# EAGLE board Qwiic_GPIO-Panel (EAGLE 9.6.0), part 1 of 2
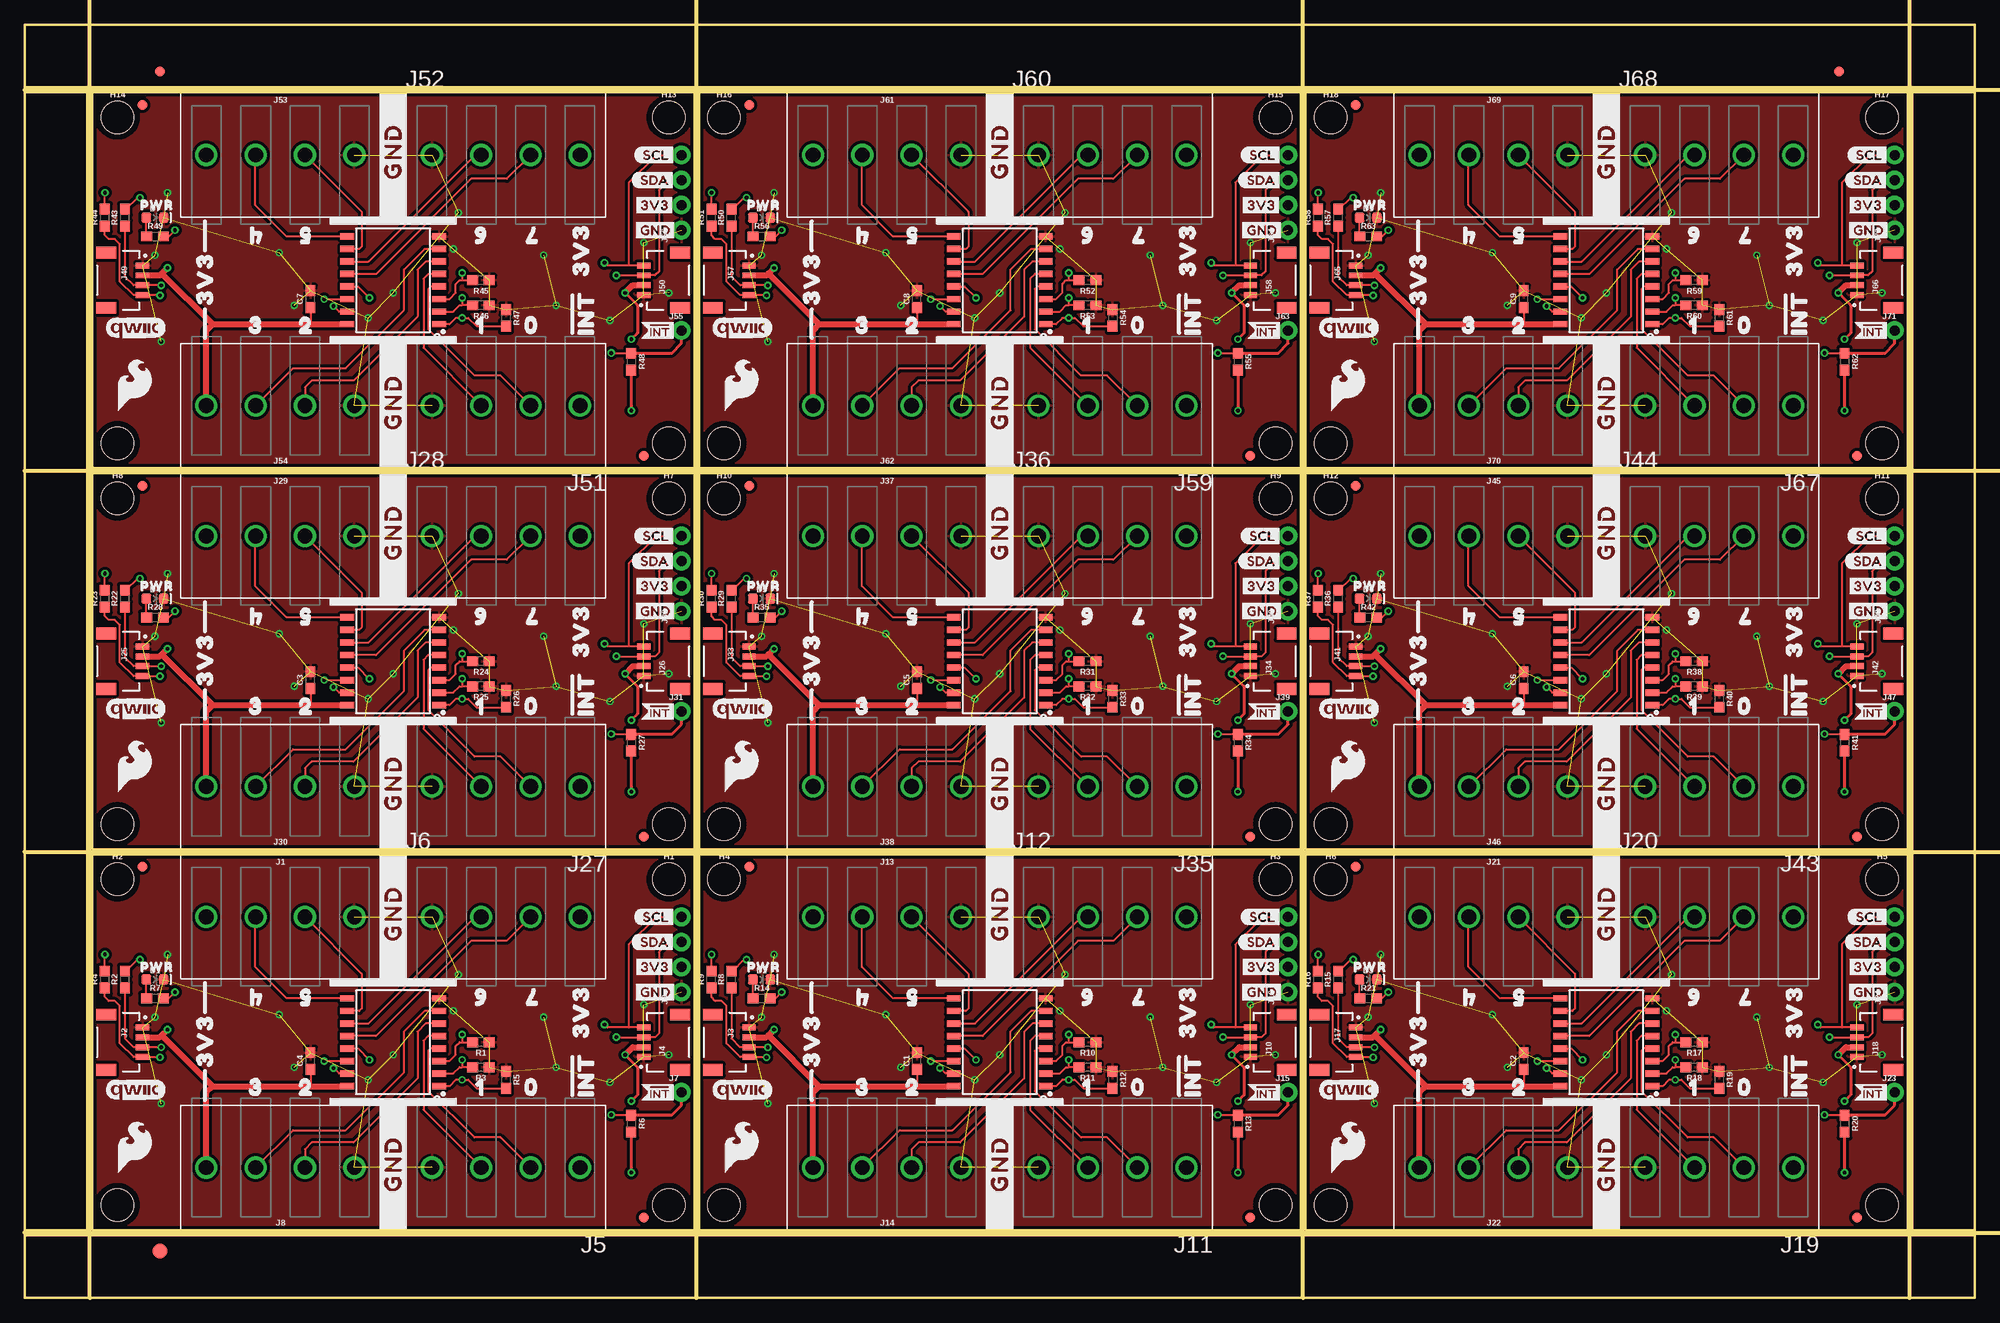
[diagram p0: board, top side]
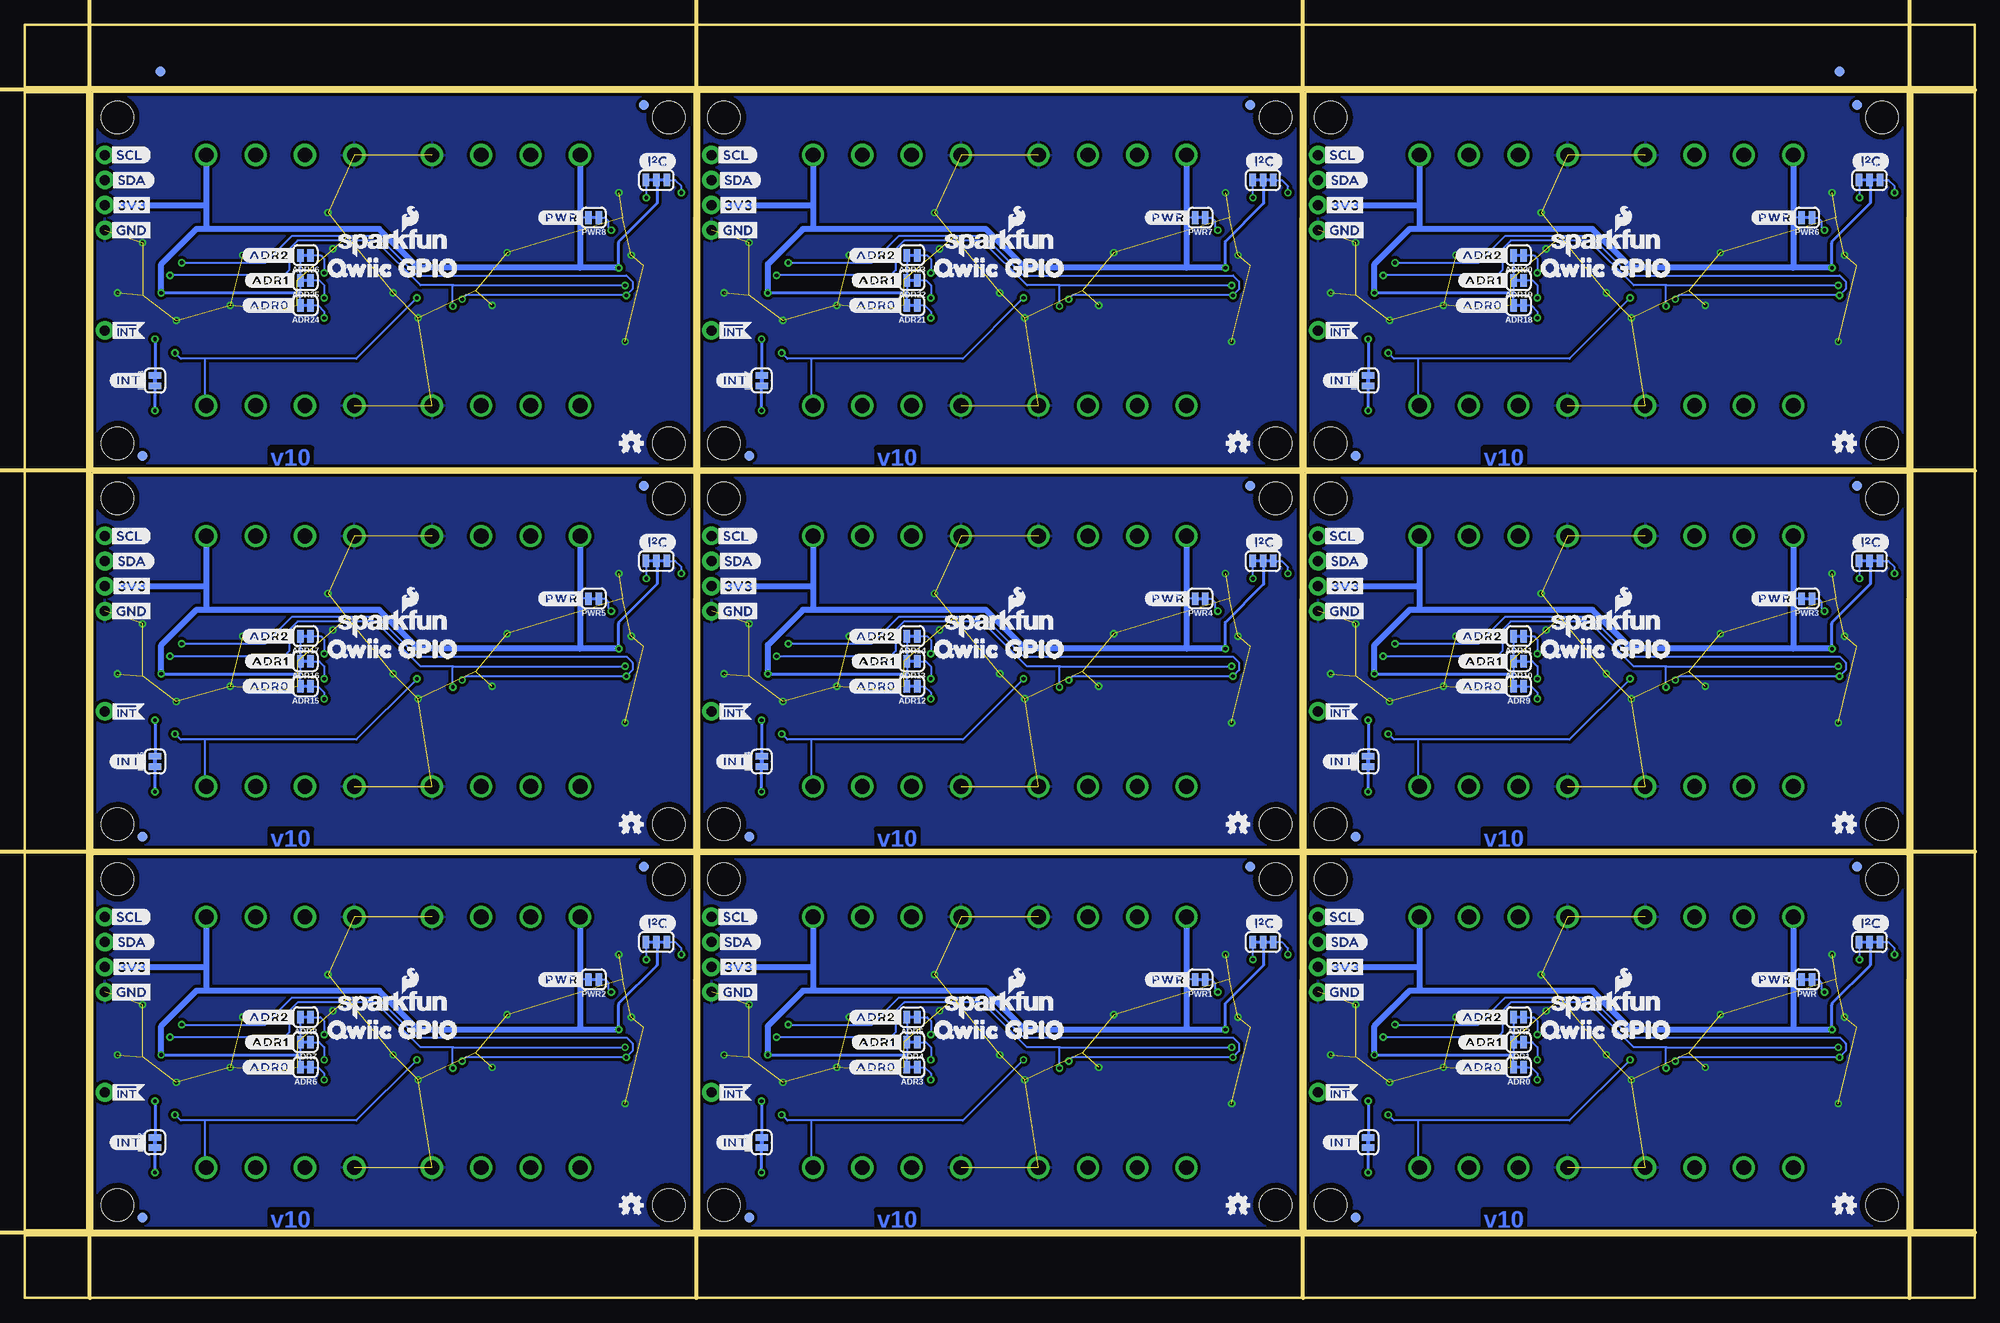
[diagram p1: board, bottom side, seen from below]

Size 197.61 x 129.03 mm. Coordinates in mm from the lower left corner, seen from the top.
Outline: 6.86,44.96 67.82,44.96 67.82,6.86 6.86,6.86 6.86,44.96
Outline: 68.33,44.96 129.29,44.96 129.29,6.86 68.33,6.86 68.33,44.96
Outline: 129.79,44.96 190.75,44.96 190.75,6.86 129.79,6.86 129.79,44.96
Outline: 6.86,83.57 67.82,83.57 67.82,45.47 6.86,45.47 6.86,83.57
Outline: 68.33,83.57 129.29,83.57 129.29,45.47 68.33,45.47 68.33,83.57
Outline: 129.79,83.57 190.75,83.57 190.75,45.47 129.79,45.47 129.79,83.57
Outline: 6.86,122.17 67.82,122.17 67.82,84.07 6.86,84.07 6.86,122.17
Outline: 68.33,122.17 129.29,122.17 129.29,84.07 68.33,84.07 68.33,122.17
Outline: 129.79,122.17 190.75,122.17 190.75,84.07 129.79,84.07 129.79,122.17
Outline: 0,6.35 197.61,6.35 197.61,0 0,0 0,6.35
Outline: 191.26,122.17 197.61,122.17 197.61,6.86 191.26,6.86 191.26,122.17
Outline: 0,129.03 197.61,129.03 197.61,122.68 0,122.68 0,129.03
Outline: 0,122.17 6.35,122.17 6.35,6.86 0,6.86 0,122.17
Copper layers (1*16): Top 0.035mm / dielectric 1.5mm / Bottom 0.035mm
Design rules "Qwiic_GPIO": minimum track width 7mil, minimum drill 15mil, track to track 7mil, track to pad 7mil, pad to pad 7mil, via to via 7mil, smd to smd 7mil, copper to edge 7mil, drill to drill 7mil, minimum pad ring 7mil, minimum via ring 7mil, stop-mask expansion 4mil, vias tented up to drill 25mil, thermal gap 10mil
Milling: 8 lines

## Footprints (pad centres in the part's own frame; a part is rotated, then mirrored left to right if it is on the bottom)
SMT-JUMPER_2_NC_TRACE_SILK = smd 0.66 x 1.27: 1 -0.521,0; 2 0.521,0
0603 = smd 1.1 x 1: 1 -0.85,0; 2 0.85,0
LED-0603 = smd 1 x 1: A -0.877,0; C 0.877,0
FIDUCIAL-1X2 = smd 1 x 1: 1 0,0
FIDUCIAL-1.5X3 = smd 1.5 x 1.5: 1 0,0
STAND-OFF = hole 3.302: 0,0
SMT-JUMPER_3_2-NC_TRACE_SILK = smd 0.66 x 1.27: 1 -1.041,0; 2 0,0; 3 1.041,0
LATCHTERMINAL-5MM-4 = drill 1.5: 1 -7.5,0; 2 -2.5,0; 3 2.5,0; 4 7.5,0
JST04_1MM_RA = smd 0.6 x 1.35: 1 -1.5,0; 2 -0.5,0; 3 0.5,0; 4 1.5,0 | smd 1.2 x 2: NC1 2.8,-3.675; NC2 -2.8,-3.675
1X01_NO_SILK = drill 1.016 pad 1.88: 1 0,0
1X04_NO_SILK = drill 1.016 pad 1.88: 1 0,0; 2 2.54,0; 3 5.08,0; 4 7.62,0
16SOIC = smd 1.397 x 0.648: 1 -4.65,4.445; 2 -4.65,3.175; 3 -4.65,1.905; 4 -4.65,0.635; 5 -4.65,-0.635; 6 -4.65,-1.905; 7 -4.65,-3.175; 8 -4.65,-4.445; 9 4.65,-4.445; 10 4.65,-3.175; 11 4.65,-1.905; 12 4.65,-0.635; 13 4.65,0.635; 14 4.65,1.905; 15 4.65,3.175; 16 4.65,4.445

## Placement (x,y rotation side)
ADR0  JUMPER-SMT_2_NC_TRACE_SILK  [SMT-JUMPER_2_NC_TRACE_SILK]  46.23,23.37 180 bottom
ADR1  JUMPER-SMT_2_NC_TRACE_SILK  [SMT-JUMPER_2_NC_TRACE_SILK]  46.23,25.91 180 bottom
ADR2  JUMPER-SMT_2_NC_TRACE_SILK  [SMT-JUMPER_2_NC_TRACE_SILK]  46.23,28.45 180 bottom
ADR3  JUMPER-SMT_2_NC_TRACE_SILK  [SMT-JUMPER_2_NC_TRACE_SILK]  107.7,23.37 180 bottom
ADR4  JUMPER-SMT_2_NC_TRACE_SILK  [SMT-JUMPER_2_NC_TRACE_SILK]  107.7,25.91 180 bottom
ADR5  JUMPER-SMT_2_NC_TRACE_SILK  [SMT-JUMPER_2_NC_TRACE_SILK]  107.7,28.45 180 bottom
ADR6  JUMPER-SMT_2_NC_TRACE_SILK  [SMT-JUMPER_2_NC_TRACE_SILK]  169.16,23.37 180 bottom
ADR7  JUMPER-SMT_2_NC_TRACE_SILK  [SMT-JUMPER_2_NC_TRACE_SILK]  169.16,25.91 180 bottom
ADR8  JUMPER-SMT_2_NC_TRACE_SILK  [SMT-JUMPER_2_NC_TRACE_SILK]  169.16,28.45 180 bottom
ADR9  JUMPER-SMT_2_NC_TRACE_SILK  [SMT-JUMPER_2_NC_TRACE_SILK]  46.23,61.98 180 bottom
ADR10  JUMPER-SMT_2_NC_TRACE_SILK  [SMT-JUMPER_2_NC_TRACE_SILK]  46.23,64.52 180 bottom
ADR11  JUMPER-SMT_2_NC_TRACE_SILK  [SMT-JUMPER_2_NC_TRACE_SILK]  46.23,67.06 180 bottom
ADR12  JUMPER-SMT_2_NC_TRACE_SILK  [SMT-JUMPER_2_NC_TRACE_SILK]  107.7,61.98 180 bottom
ADR13  JUMPER-SMT_2_NC_TRACE_SILK  [SMT-JUMPER_2_NC_TRACE_SILK]  107.7,64.52 180 bottom
ADR14  JUMPER-SMT_2_NC_TRACE_SILK  [SMT-JUMPER_2_NC_TRACE_SILK]  107.7,67.06 180 bottom
ADR15  JUMPER-SMT_2_NC_TRACE_SILK  [SMT-JUMPER_2_NC_TRACE_SILK]  169.16,61.98 180 bottom
ADR16  JUMPER-SMT_2_NC_TRACE_SILK  [SMT-JUMPER_2_NC_TRACE_SILK]  169.16,64.52 180 bottom
ADR17  JUMPER-SMT_2_NC_TRACE_SILK  [SMT-JUMPER_2_NC_TRACE_SILK]  169.16,67.06 180 bottom
ADR18  JUMPER-SMT_2_NC_TRACE_SILK  [SMT-JUMPER_2_NC_TRACE_SILK]  46.23,100.58 180 bottom
ADR19  JUMPER-SMT_2_NC_TRACE_SILK  [SMT-JUMPER_2_NC_TRACE_SILK]  46.23,103.12 180 bottom
ADR20  JUMPER-SMT_2_NC_TRACE_SILK  [SMT-JUMPER_2_NC_TRACE_SILK]  46.23,105.66 180 bottom
ADR21  JUMPER-SMT_2_NC_TRACE_SILK  [SMT-JUMPER_2_NC_TRACE_SILK]  107.7,100.58 180 bottom
ADR22  JUMPER-SMT_2_NC_TRACE_SILK  [SMT-JUMPER_2_NC_TRACE_SILK]  107.7,103.12 180 bottom
ADR23  JUMPER-SMT_2_NC_TRACE_SILK  [SMT-JUMPER_2_NC_TRACE_SILK]  107.7,105.66 180 bottom
ADR24  JUMPER-SMT_2_NC_TRACE_SILK  [SMT-JUMPER_2_NC_TRACE_SILK]  169.16,100.58 180 bottom
ADR25  JUMPER-SMT_2_NC_TRACE_SILK  [SMT-JUMPER_2_NC_TRACE_SILK]  169.16,103.12 180 bottom
ADR26  JUMPER-SMT_2_NC_TRACE_SILK  [SMT-JUMPER_2_NC_TRACE_SILK]  169.16,105.66 180 bottom
C1  0.1uF  [0603]  90.42,24 90 top
C2  0.1uF  [0603]  151.89,24 90 top
C3  0.1uF  [0603]  28.96,62.61 90 top
C4  0.1uF  [0603]  28.96,24 90 top
C5  0.1uF  [0603]  90.42,62.61 90 top
C6  0.1uF  [0603]  151.89,62.61 90 top
C7  0.1uF  [0603]  28.96,101.22 90 top
C8  0.1uF  [0603]  90.42,101.22 90 top
C9  0.1uF  [0603]  151.89,101.22 90 top
D1  RED  [LED-0603]  13.21,32.26 0 top
D2  RED  [LED-0603]  74.68,32.26 0 top
D3  RED  [LED-0603]  136.14,32.26 0 top
D4  RED  [LED-0603]  13.21,70.87 0 top
D5  RED  [LED-0603]  74.68,70.87 0 top
D6  RED  [LED-0603]  136.14,70.87 0 top
D7  RED  [LED-0603]  13.21,109.47 0 top
D8  RED  [LED-0603]  74.68,109.47 0 top
D9  RED  [LED-0603]  136.14,109.47 0 top
E$1  [FIDUCIAL-1X2]  13.72,124.27 0 top
E$2  [FIDUCIAL-1X2]  13.72,124.27 0 bottom
E$3  [FIDUCIAL-1X2]  183.83,124.27 0 top
E$4  [FIDUCIAL-1X2]  183.83,124.27 0 bottom
E$5  [FIDUCIAL-1.5X3]  13.72,4.76 0 top
FD1  FIDUCIAL1X2  [FIDUCIAL-1X2]  11.94,43.69 0 bottom
FD2  FIDUCIAL1X2  [FIDUCIAL-1X2]  62.74,8.13 270 bottom
FD3  FIDUCIAL1X2  [FIDUCIAL-1X2]  73.41,43.69 0 bottom
FD4  FIDUCIAL1X2  [FIDUCIAL-1X2]  124.21,8.13 270 bottom
FD5  FIDUCIAL1X2  [FIDUCIAL-1X2]  134.87,43.69 0 bottom
FD6  FIDUCIAL1X2  [FIDUCIAL-1X2]  185.67,8.13 270 bottom
FD7  FIDUCIAL1X2  [FIDUCIAL-1X2]  11.94,82.3 0 bottom
FD8  FIDUCIAL1X2  [FIDUCIAL-1X2]  62.74,46.74 270 bottom
FD9  FIDUCIAL1X2  [FIDUCIAL-1X2]  73.41,82.3 0 bottom
FD10  FIDUCIAL1X2  [FIDUCIAL-1X2]  124.21,46.74 270 bottom
FD11  FIDUCIAL1X2  [FIDUCIAL-1X2]  134.87,82.3 0 bottom
FD12  FIDUCIAL1X2  [FIDUCIAL-1X2]  185.67,46.74 270 bottom
FD13  FIDUCIAL1X2  [FIDUCIAL-1X2]  11.94,120.9 0 bottom
FD14  FIDUCIAL1X2  [FIDUCIAL-1X2]  62.74,85.34 270 bottom
FD15  FIDUCIAL1X2  [FIDUCIAL-1X2]  73.41,120.9 0 bottom
FD16  FIDUCIAL1X2  [FIDUCIAL-1X2]  124.21,85.34 270 bottom
FD17  FIDUCIAL1X2  [FIDUCIAL-1X2]  134.87,120.9 0 bottom
FD18  FIDUCIAL1X2  [FIDUCIAL-1X2]  185.67,85.34 270 bottom
FRAME1  FRAME-LETTER  [CREATIVE_COMMONS]  5.59,-3.3 0 top  (outside the outline)
FRAME2  FRAME-LETTER  [CREATIVE_COMMONS]  67.06,-3.3 0 top  (outside the outline)
FRAME3  FRAME-LETTER  [CREATIVE_COMMONS]  128.52,-3.3 0 top  (outside the outline)
FRAME4  FRAME-LETTER  [CREATIVE_COMMONS]  5.59,35.31 0 top
FRAME5  FRAME-LETTER  [CREATIVE_COMMONS]  67.06,35.31 0 top
FRAME6  FRAME-LETTER  [CREATIVE_COMMONS]  128.52,35.31 0 top
FRAME7  FRAME-LETTER  [CREATIVE_COMMONS]  5.59,73.91 0 top
FRAME8  FRAME-LETTER  [CREATIVE_COMMONS]  67.06,73.91 0 top
FRAME9  FRAME-LETTER  [CREATIVE_COMMONS]  128.52,73.91 0 top
H1  STAND-OFF  [STAND-OFF]  65.28,42.42 0 top
H2  STAND-OFF  [STAND-OFF]  9.4,42.42 0 top
H3  STAND-OFF  [STAND-OFF]  126.75,42.42 0 top
H4  STAND-OFF  [STAND-OFF]  70.87,42.42 0 top
H5  STAND-OFF  [STAND-OFF]  188.21,42.42 0 top
H6  STAND-OFF  [STAND-OFF]  132.33,42.42 0 top
H7  STAND-OFF  [STAND-OFF]  65.28,81.03 0 top
H8  STAND-OFF  [STAND-OFF]  9.4,81.03 0 top
H9  STAND-OFF  [STAND-OFF]  126.75,81.03 0 top
H10  STAND-OFF  [STAND-OFF]  70.87,81.03 0 top
H11  STAND-OFF  [STAND-OFF]  188.21,81.03 0 top
H12  STAND-OFF  [STAND-OFF]  132.33,81.03 0 top
H13  STAND-OFF  [STAND-OFF]  65.28,119.63 0 top
H14  STAND-OFF  [STAND-OFF]  9.4,119.63 0 top
H15  STAND-OFF  [STAND-OFF]  126.75,119.63 0 top
H16  STAND-OFF  [STAND-OFF]  70.87,119.63 0 top
H17  STAND-OFF  [STAND-OFF]  188.21,119.63 0 top
H18  STAND-OFF  [STAND-OFF]  132.33,119.63 0 top
I2C  JUMPER-SMT_3_2-NC_TRACE_SILK  [SMT-JUMPER_3_2-NC_TRACE_SILK]  10.67,36.07 0 bottom
I2C1  JUMPER-SMT_3_2-NC_TRACE_SILK  [SMT-JUMPER_3_2-NC_TRACE_SILK]  72.14,36.07 0 bottom
I2C2  JUMPER-SMT_3_2-NC_TRACE_SILK  [SMT-JUMPER_3_2-NC_TRACE_SILK]  133.6,36.07 0 bottom
I2C3  JUMPER-SMT_3_2-NC_TRACE_SILK  [SMT-JUMPER_3_2-NC_TRACE_SILK]  10.67,74.68 0 bottom
I2C4  JUMPER-SMT_3_2-NC_TRACE_SILK  [SMT-JUMPER_3_2-NC_TRACE_SILK]  72.14,74.68 0 bottom
I2C5  JUMPER-SMT_3_2-NC_TRACE_SILK  [SMT-JUMPER_3_2-NC_TRACE_SILK]  133.6,74.68 0 bottom
I2C6  JUMPER-SMT_3_2-NC_TRACE_SILK  [SMT-JUMPER_3_2-NC_TRACE_SILK]  10.67,113.28 0 bottom
I2C7  JUMPER-SMT_3_2-NC_TRACE_SILK  [SMT-JUMPER_3_2-NC_TRACE_SILK]  72.14,113.28 0 bottom
I2C8  JUMPER-SMT_3_2-NC_TRACE_SILK  [SMT-JUMPER_3_2-NC_TRACE_SILK]  133.6,113.28 0 bottom
INT  JUMPER-SMT_2_NC_TRACE_SILK  [SMT-JUMPER_2_NC_TRACE_SILK]  61.47,15.75 90 bottom
INT1  JUMPER-SMT_2_NC_TRACE_SILK  [SMT-JUMPER_2_NC_TRACE_SILK]  122.94,15.75 90 bottom
INT2  JUMPER-SMT_2_NC_TRACE_SILK  [SMT-JUMPER_2_NC_TRACE_SILK]  184.4,15.75 90 bottom
INT3  JUMPER-SMT_2_NC_TRACE_SILK  [SMT-JUMPER_2_NC_TRACE_SILK]  61.47,54.36 90 bottom
INT4  JUMPER-SMT_2_NC_TRACE_SILK  [SMT-JUMPER_2_NC_TRACE_SILK]  122.94,54.36 90 bottom
INT5  JUMPER-SMT_2_NC_TRACE_SILK  [SMT-JUMPER_2_NC_TRACE_SILK]  184.4,54.36 90 bottom
INT6  JUMPER-SMT_2_NC_TRACE_SILK  [SMT-JUMPER_2_NC_TRACE_SILK]  61.47,92.96 90 bottom
INT7  JUMPER-SMT_2_NC_TRACE_SILK  [SMT-JUMPER_2_NC_TRACE_SILK]  122.94,92.96 90 bottom
INT8  JUMPER-SMT_2_NC_TRACE_SILK  [SMT-JUMPER_2_NC_TRACE_SILK]  184.4,92.96 90 bottom
J1  [LATCHTERMINAL-5MM-4]  25.91,38.61 0 top
J2  QWIIC  [JST04_1MM_RA]  11.94,25.91 270 top
J3  QWIIC  [JST04_1MM_RA]  73.41,25.91 270 top
J4  QWIIC  [JST04_1MM_RA]  62.74,25.91 90 top
J5  [LATCHTERMINAL-5MM-4]  48.77,13.21 180 top
J6  [LATCHTERMINAL-5MM-4]  48.77,38.61 0 top
J7  [1X01_NO_SILK]  66.55,20.83 0 top
J8  [LATCHTERMINAL-5MM-4]  25.91,13.21 180 top
J9  [1X04_NO_SILK]  66.55,30.99 90 top
J10  QWIIC  [JST04_1MM_RA]  124.21,25.91 90 top
J11  [LATCHTERMINAL-5MM-4]  110.24,13.21 180 top
J12  [LATCHTERMINAL-5MM-4]  110.24,38.61 0 top
J13  [LATCHTERMINAL-5MM-4]  87.38,38.61 0 top
J14  [LATCHTERMINAL-5MM-4]  87.38,13.21 180 top
J15  [1X01_NO_SILK]  128.02,20.83 0 top
J16  [1X04_NO_SILK]  128.02,30.99 90 top
J17  QWIIC  [JST04_1MM_RA]  134.87,25.91 270 top
J18  QWIIC  [JST04_1MM_RA]  185.67,25.91 90 top
J19  [LATCHTERMINAL-5MM-4]  171.7,13.21 180 top
J20  [LATCHTERMINAL-5MM-4]  171.7,38.61 0 top
J21  [LATCHTERMINAL-5MM-4]  148.84,38.61 0 top
J22  [LATCHTERMINAL-5MM-4]  148.84,13.21 180 top
J23  [1X01_NO_SILK]  189.48,20.83 0 top
J24  [1X04_NO_SILK]  189.48,30.99 90 top
J25  QWIIC  [JST04_1MM_RA]  11.94,64.52 270 top
J26  QWIIC  [JST04_1MM_RA]  62.74,64.52 90 top
J27  [LATCHTERMINAL-5MM-4]  48.77,51.82 180 top
J28  [LATCHTERMINAL-5MM-4]  48.77,77.22 0 top
J29  [LATCHTERMINAL-5MM-4]  25.91,77.22 0 top
J30  [LATCHTERMINAL-5MM-4]  25.91,51.82 180 top
J31  [1X01_NO_SILK]  66.55,59.44 0 top
J32  [1X04_NO_SILK]  66.55,69.6 90 top
J33  QWIIC  [JST04_1MM_RA]  73.41,64.52 270 top
J34  QWIIC  [JST04_1MM_RA]  124.21,64.52 90 top
J35  [LATCHTERMINAL-5MM-4]  110.24,51.82 180 top
J36  [LATCHTERMINAL-5MM-4]  110.24,77.22 0 top
J37  [LATCHTERMINAL-5MM-4]  87.38,77.22 0 top
J38  [LATCHTERMINAL-5MM-4]  87.38,51.82 180 top
J39  [1X01_NO_SILK]  128.02,59.44 0 top
J40  [1X04_NO_SILK]  128.02,69.6 90 top
J41  QWIIC  [JST04_1MM_RA]  134.87,64.52 270 top
J42  QWIIC  [JST04_1MM_RA]  185.67,64.52 90 top
J43  [LATCHTERMINAL-5MM-4]  171.7,51.82 180 top
J44  [LATCHTERMINAL-5MM-4]  171.7,77.22 0 top
J45  [LATCHTERMINAL-5MM-4]  148.84,77.22 0 top
J46  [LATCHTERMINAL-5MM-4]  148.84,51.82 180 top
J47  [1X01_NO_SILK]  189.48,59.44 0 top
J48  [1X04_NO_SILK]  189.48,69.6 90 top
J49  QWIIC  [JST04_1MM_RA]  11.94,103.12 270 top
J50  QWIIC  [JST04_1MM_RA]  62.74,103.12 90 top
J51  [LATCHTERMINAL-5MM-4]  48.77,90.42 180 top
J52  [LATCHTERMINAL-5MM-4]  48.77,115.82 0 top
J53  [LATCHTERMINAL-5MM-4]  25.91,115.82 0 top
J54  [LATCHTERMINAL-5MM-4]  25.91,90.42 180 top
J55  [1X01_NO_SILK]  66.55,98.04 0 top
J56  [1X04_NO_SILK]  66.55,108.2 90 top
J57  QWIIC  [JST04_1MM_RA]  73.41,103.12 270 top
J58  QWIIC  [JST04_1MM_RA]  124.21,103.12 90 top
J59  [LATCHTERMINAL-5MM-4]  110.24,90.42 180 top
J60  [LATCHTERMINAL-5MM-4]  110.24,115.82 0 top
J61  [LATCHTERMINAL-5MM-4]  87.38,115.82 0 top
J62  [LATCHTERMINAL-5MM-4]  87.38,90.42 180 top
J63  [1X01_NO_SILK]  128.02,98.04 0 top
J64  [1X04_NO_SILK]  128.02,108.2 90 top
J65  QWIIC  [JST04_1MM_RA]  134.87,103.12 270 top
J66  QWIIC  [JST04_1MM_RA]  185.67,103.12 90 top
J67  [LATCHTERMINAL-5MM-4]  171.7,90.42 180 top
J68  [LATCHTERMINAL-5MM-4]  171.7,115.82 0 top
J69  [LATCHTERMINAL-5MM-4]  148.84,115.82 0 top
J70  [LATCHTERMINAL-5MM-4]  148.84,90.42 180 top
J71  [1X01_NO_SILK]  189.48,98.04 0 top
J72  [1X04_NO_SILK]  189.48,108.2 90 top
JP1  STAND-OFF  [STAND-OFF]  70.87,9.4 0 top
JP2  FIDUCIAL1X2  [FIDUCIAL-1X2]  62.74,8.13 0 top
JP3  STAND-OFF  [STAND-OFF]  9.4,9.4 0 top
JP4  STAND-OFF  [STAND-OFF]  65.28,9.4 0 top
JP5  STAND-OFF  [STAND-OFF]  126.75,9.4 0 top
JP6  FIDUCIAL1X2  [FIDUCIAL-1X2]  11.94,43.69 0 top
JP7  FIDUCIAL1X2  [FIDUCIAL-1X2]  124.21,8.13 0 top
JP8  FIDUCIAL1X2  [FIDUCIAL-1X2]  73.41,43.69 0 top
JP9  STAND-OFF  [STAND-OFF]  132.33,9.4 0 top
JP10  STAND-OFF  [STAND-OFF]  188.21,9.4 0 top
JP11  FIDUCIAL1X2  [FIDUCIAL-1X2]  185.67,8.13 0 top
JP12  FIDUCIAL1X2  [FIDUCIAL-1X2]  134.87,43.69 0 top
JP13  STAND-OFF  [STAND-OFF]  9.4,48.01 0 top
JP14  STAND-OFF  [STAND-OFF]  65.28,48.01 0 top
JP15  FIDUCIAL1X2  [FIDUCIAL-1X2]  62.74,46.74 0 top
JP16  FIDUCIAL1X2  [FIDUCIAL-1X2]  11.94,82.3 0 top
JP17  STAND-OFF  [STAND-OFF]  70.87,48.01 0 top
JP18  STAND-OFF  [STAND-OFF]  126.75,48.01 0 top
JP19  FIDUCIAL1X2  [FIDUCIAL-1X2]  124.21,46.74 0 top
JP20  FIDUCIAL1X2  [FIDUCIAL-1X2]  73.41,82.3 0 top
JP21  STAND-OFF  [STAND-OFF]  132.33,48.01 0 top
JP22  STAND-OFF  [STAND-OFF]  188.21,48.01 0 top
JP23  FIDUCIAL1X2  [FIDUCIAL-1X2]  185.67,46.74 0 top
JP24  FIDUCIAL1X2  [FIDUCIAL-1X2]  134.87,82.3 0 top
JP25  STAND-OFF  [STAND-OFF]  9.4,86.61 0 top
JP26  STAND-OFF  [STAND-OFF]  65.28,86.61 0 top
JP27  FIDUCIAL1X2  [FIDUCIAL-1X2]  62.74,85.34 0 top
JP28  FIDUCIAL1X2  [FIDUCIAL-1X2]  11.94,120.9 0 top
JP29  STAND-OFF  [STAND-OFF]  70.87,86.61 0 top
JP30  STAND-OFF  [STAND-OFF]  126.75,86.61 0 top
JP31  FIDUCIAL1X2  [FIDUCIAL-1X2]  124.21,85.34 0 top
JP32  FIDUCIAL1X2  [FIDUCIAL-1X2]  73.41,120.9 0 top
JP33  STAND-OFF  [STAND-OFF]  132.33,86.61 0 top
JP34  STAND-OFF  [STAND-OFF]  188.21,86.61 0 top
JP35  FIDUCIAL1X2  [FIDUCIAL-1X2]  185.67,85.34 0 top
JP36  FIDUCIAL1X2  [FIDUCIAL-1X2]  134.87,120.9 0 top
LOGO1  OSHW-LOGOMINI  [OSHW-LOGO-MINI]  13.21,9.4 0 bottom
LOGO2  REVISION  [REVISION]  17.02,-5.84 0 top  (outside the outline)
LOGO3  SFE_LOGO_NAME_FLAME.1_INCH  [SFE_LOGO_NAME_FLAME_.1]  37.34,29.72 0 bottom
LOGO4  SFE_LOGO_FLAME.2_INCH  [SFE_LOGO_FLAME_.2]  11.18,15.24 0 top
LOGO5  OSHW-LOGOMINI  [OSHW-LOGO-MINI]  74.68,9.4 0 bottom
LOGO6  REVISION  [REVISION]  78.49,-5.84 0 top  (outside the outline)
LOGO7  SFE_LOGO_NAME_FLAME.1_INCH  [SFE_LOGO_NAME_FLAME_.1]  98.81,29.72 0 bottom
LOGO8  SFE_LOGO_FLAME.2_INCH  [SFE_LOGO_FLAME_.2]  72.64,15.24 0 top
LOGO9  OSHW-LOGOMINI  [OSHW-LOGO-MINI]  136.14,9.4 0 bottom
LOGO10  REVISION  [REVISION]  139.95,-5.84 0 top  (outside the outline)
LOGO11  SFE_LOGO_NAME_FLAME.1_INCH  [SFE_LOGO_NAME_FLAME_.1]  160.27,29.72 0 bottom
LOGO12  SFE_LOGO_FLAME.2_INCH  [SFE_LOGO_FLAME_.2]  134.11,15.24 0 top
LOGO13  OSHW-LOGOMINI  [OSHW-LOGO-MINI]  13.21,48.01 0 bottom
LOGO14  REVISION  [REVISION]  17.02,32.77 0 top
LOGO15  SFE_LOGO_NAME_FLAME.1_INCH  [SFE_LOGO_NAME_FLAME_.1]  37.34,68.33 0 bottom
LOGO16  SFE_LOGO_FLAME.2_INCH  [SFE_LOGO_FLAME_.2]  11.18,53.85 0 top
LOGO17  OSHW-LOGOMINI  [OSHW-LOGO-MINI]  74.68,48.01 0 bottom
LOGO18  REVISION  [REVISION]  78.49,32.77 0 top
LOGO19  SFE_LOGO_NAME_FLAME.1_INCH  [SFE_LOGO_NAME_FLAME_.1]  98.81,68.33 0 bottom
LOGO20  SFE_LOGO_FLAME.2_INCH  [SFE_LOGO_FLAME_.2]  72.64,53.85 0 top
LOGO21  OSHW-LOGOMINI  [OSHW-LOGO-MINI]  136.14,48.01 0 bottom
LOGO22  REVISION  [REVISION]  139.95,32.77 0 top
LOGO23  SFE_LOGO_NAME_FLAME.1_INCH  [SFE_LOGO_NAME_FLAME_.1]  160.27,68.33 0 bottom
LOGO24  SFE_LOGO_FLAME.2_INCH  [SFE_LOGO_FLAME_.2]  134.11,53.85 0 top
LOGO25  OSHW-LOGOMINI  [OSHW-LOGO-MINI]  13.21,86.61 0 bottom
LOGO26  REVISION  [REVISION]  17.02,71.37 0 top
LOGO27  SFE_LOGO_NAME_FLAME.1_INCH  [SFE_LOGO_NAME_FLAME_.1]  37.34,106.93 0 bottom
LOGO28  SFE_LOGO_FLAME.2_INCH  [SFE_LOGO_FLAME_.2]  11.18,92.46 0 top
LOGO29  OSHW-LOGOMINI  [OSHW-LOGO-MINI]  74.68,86.61 0 bottom
LOGO30  REVISION  [REVISION]  78.49,71.37 0 top
LOGO31  SFE_LOGO_NAME_FLAME.1_INCH  [SFE_LOGO_NAME_FLAME_.1]  98.81,106.93 0 bottom
LOGO32  SFE_LOGO_FLAME.2_INCH  [SFE_LOGO_FLAME_.2]  72.64,92.46 0 top
LOGO33  OSHW-LOGOMINI  [OSHW-LOGO-MINI]  136.14,86.61 0 bottom
LOGO34  REVISION  [REVISION]  139.95,71.37 0 top
LOGO35  SFE_LOGO_NAME_FLAME.1_INCH  [SFE_LOGO_NAME_FLAME_.1]  160.27,106.93 0 bottom
LOGO36  SFE_LOGO_FLAME.2_INCH  [SFE_LOGO_FLAME_.2]  134.11,92.46 0 top
PWR  JUMPER-SMT_2_NC_TRACE_SILK  [SMT-JUMPER_2_NC_TRACE_SILK]  17.02,32.26 180 bottom
PWR1  JUMPER-SMT_2_NC_TRACE_SILK  [SMT-JUMPER_2_NC_TRACE_SILK]  78.49,32.26 180 bottom
PWR2  JUMPER-SMT_2_NC_TRACE_SILK  [SMT-JUMPER_2_NC_TRACE_SILK]  139.95,32.26 180 bottom
PWR3  JUMPER-SMT_2_NC_TRACE_SILK  [SMT-JUMPER_2_NC_TRACE_SILK]  17.02,70.87 180 bottom
PWR4  JUMPER-SMT_2_NC_TRACE_SILK  [SMT-JUMPER_2_NC_TRACE_SILK]  78.49,70.87 180 bottom
PWR5  JUMPER-SMT_2_NC_TRACE_SILK  [SMT-JUMPER_2_NC_TRACE_SILK]  139.95,70.87 180 bottom
PWR6  JUMPER-SMT_2_NC_TRACE_SILK  [SMT-JUMPER_2_NC_TRACE_SILK]  17.02,109.47 180 bottom
PWR7  JUMPER-SMT_2_NC_TRACE_SILK  [SMT-JUMPER_2_NC_TRACE_SILK]  78.49,109.47 180 bottom
PWR8  JUMPER-SMT_2_NC_TRACE_SILK  [SMT-JUMPER_2_NC_TRACE_SILK]  139.95,109.47 180 bottom
R1  2.2k  [0603]  46.23,25.91 180 top
R2  2.2k  [0603]  10.16,32.26 90 top
R3  2.2k  [0603]  46.23,23.37 180 top
R4  2.2k  [0603]  8.13,32.26 90 top
R5  2.2k  [0603]  48.77,22.1 270 top
R6  10k  [0603]  61.47,17.65 270 top
R7  1k  [0603]  13.21,30.35 0 top
R8  2.2k  [0603]  71.63,32.26 90 top
R9  2.2k  [0603]  69.6,32.26 90 top
R10  2.2k  [0603]  107.7,25.91 180 top
R11  2.2k  [0603]  107.7,23.37 180 top
R12  2.2k  [0603]  110.24,22.1 270 top
R13  10k  [0603]  122.94,17.65 270 top
R14  1k  [0603]  74.68,30.35 0 top
R15  2.2k  [0603]  133.1,32.26 90 top
R16  2.2k  [0603]  131.06,32.26 90 top
R17  2.2k  [0603]  169.16,25.91 180 top
R18  2.2k  [0603]  169.16,23.37 180 top
R19  2.2k  [0603]  171.7,22.1 270 top
R20  10k  [0603]  184.4,17.65 270 top
R21  1k  [0603]  136.14,30.35 0 top
R22  2.2k  [0603]  10.16,70.87 90 top
R23  2.2k  [0603]  8.13,70.87 90 top
R24  2.2k  [0603]  46.23,64.52 180 top
R25  2.2k  [0603]  46.23,61.98 180 top
R26  2.2k  [0603]  48.77,60.71 270 top
R27  10k  [0603]  61.47,56.26 270 top
R28  1k  [0603]  13.21,68.96 0 top
R29  2.2k  [0603]  71.63,70.87 90 top
R30  2.2k  [0603]  69.6,70.87 90 top
R31  2.2k  [0603]  107.7,64.52 180 top
R32  2.2k  [0603]  107.7,61.98 180 top
R33  2.2k  [0603]  110.24,60.71 270 top
R34  10k  [0603]  122.94,56.26 270 top
R35  1k  [0603]  74.68,68.96 0 top
R36  2.2k  [0603]  133.1,70.87 90 top
R37  2.2k  [0603]  131.06,70.87 90 top
R38  2.2k  [0603]  169.16,64.52 180 top
R39  2.2k  [0603]  169.16,61.98 180 top
R40  2.2k  [0603]  171.7,60.71 270 top
R41  10k  [0603]  184.4,56.26 270 top
R42  1k  [0603]  136.14,68.96 0 top
R43  2.2k  [0603]  10.16,109.47 90 top
R44  2.2k  [0603]  8.13,109.47 90 top
R45  2.2k  [0603]  46.23,103.12 180 top
R46  2.2k  [0603]  46.23,100.58 180 top
R47  2.2k  [0603]  48.77,99.31 270 top
R48  10k  [0603]  61.47,94.87 270 top
R49  1k  [0603]  13.21,107.57 0 top
R50  2.2k  [0603]  71.63,109.47 90 top
R51  2.2k  [0603]  69.6,109.47 90 top
R52  2.2k  [0603]  107.7,103.12 180 top
R53  2.2k  [0603]  107.7,100.58 180 top
R54  2.2k  [0603]  110.24,99.31 270 top
R55  10k  [0603]  122.94,94.87 270 top
R56  1k  [0603]  74.68,107.57 0 top
R57  2.2k  [0603]  133.1,109.47 90 top
R58  2.2k  [0603]  131.06,109.47 90 top
R59  2.2k  [0603]  169.16,103.12 180 top
R60  2.2k  [0603]  169.16,100.58 180 top
R61  2.2k  [0603]  171.7,99.31 270 top
R62  10k  [0603]  184.4,94.87 270 top
R63  1k  [0603]  136.14,107.57 0 top
U1  TCA9534  [16SOIC]  98.81,25.91 180 top
U2  TCA9534  [16SOIC]  160.27,25.91 180 top
U3  TCA9534  [16SOIC]  37.34,25.91 180 top
U4  TCA9534  [16SOIC]  37.34,64.52 180 top
U5  TCA9534  [16SOIC]  98.81,64.52 180 top
U6  TCA9534  [16SOIC]  160.27,64.52 180 top
U7  TCA9534  [16SOIC]  37.34,103.12 180 top
U8  TCA9534  [16SOIC]  98.81,103.12 180 top
U9  TCA9534  [16SOIC]  160.27,103.12 180 top
U$1  [I2C]  12.45,37.97 0 bottom
U$2  [20]  26.54,21.34 0 top
U$3  [3V33]  61.47,33.53 0 top
U$4  [30]  21.46,21.34 0 top
U$5  [#ADR1#0]  52.32,25.91 0 bottom
U$6  [10]  44.45,21.34 0 top
U$7  [GND4]  61.47,30.99 0 top
U$8  [QWIIC_GPIO7]  45.59,27.18 0 bottom
U$9  [SCL6]  61.72,38.61 0 top
U$10  [SDA5]  61.47,36.07 0 top
U$11  [#ADR2#0]  52.58,28.45 0 bottom
U$12  [#INT#0]  66.04,15.75 0 bottom
U$13  [#INT0]  66.42,20.83 0 bottom
U$14  [00]  49.4,21.34 0 top
U$15  [#ADR0#0]  52.58,23.37 0 bottom
U$16  [3V33]  122.94,33.53 0 top
U$17  [GND4]  122.94,30.99 0 top
U$18  [QWIIC_GPIO7]  107.06,27.18 0 bottom
U$19  [SCL6]  123.19,38.61 0 top
U$20  [SDA5]  122.94,36.07 0 top
U$21  [QWIIC_6MM]  11.3,21.08 0 top
U$22  [#INT0]  62.23,20.83 0 top
U$23  [SCL0]  66.29,38.61 0 bottom
U$24  [SDA1]  66.17,36.07 0 bottom
U$25  [GND4]  66.29,30.99 0 bottom
U$26  [3V33]  66.17,33.53 0 bottom
U$27  [QWIIC_6MM]  72.77,21.08 0 top
U$28  [SCL0]  127.76,38.61 0 bottom
U$29  [#INT0]  56.64,19.18 90 top
U$30  [3V30]  18.29,22.23 90 top
U$31  [3V30]  56.39,25.15 90 top
U$32  [40]  25.27,30.48 180 top
U$33  [50]  30.23,30.48 180 top
U$34  [PWR0]  11.05,33.53 0 top
U$35  [60]  48.01,30.48 180 top
U$36  [SDA1]  127.64,36.07 0 bottom
U$37  [70]  53.21,30.48 180 top
U$38  [#GND#0]  37.34,9.4 90 top
U$39  [#PWR#0]  22.61,32.26 0 bottom
U$40  [#GND#0]  37.34,34.8 90 top
U$41  [GND4]  127.76,30.99 0 bottom
U$42  [3V33]  127.64,33.53 0 bottom
U$43  [#INT0]  127.89,20.83 0 bottom
U$44  [#INT0]  123.7,20.83 0 top
U$45  [I2C]  73.91,37.97 0 bottom
U$46  [PWR0]  72.52,33.53 0 top
U$47  [#INT#0]  127.51,15.75 0 bottom
U$48  [#PWR#0]  84.07,32.26 0 bottom
U$49  [20]  88.01,21.34 0 top
U$50  [30]  82.93,21.34 0 top
U$51  [10]  105.92,21.34 0 top
U$52  [00]  110.87,21.34 0 top
U$53  [#INT0]  118.11,19.18 90 top
U$54  [3V30]  79.76,22.23 90 top
U$55  [3V30]  117.86,25.15 90 top
U$56  [40]  86.74,30.48 180 top
U$57  [50]  91.69,30.48 180 top
U$58  [60]  109.47,30.48 180 top
U$59  [70]  114.68,30.48 180 top
U$60  [#GND#0]  98.81,9.4 90 top
U$61  [#GND#0]  98.81,34.8 90 top
U$62  [#ADR0#0]  114.05,23.37 0 bottom
U$63  [#ADR1#0]  113.79,25.91 0 bottom
U$64  [#ADR2#0]  114.05,28.45 0 bottom
U$65  [3V33]  184.4,33.53 0 top
U$66  [GND4]  184.4,30.99 0 top
U$67  [QWIIC_GPIO7]  168.53,27.18 0 bottom
U$68  [SCL6]  184.66,38.61 0 top
U$69  [SDA5]  184.4,36.07 0 top
U$70  [QWIIC_6MM]  134.24,21.08 0 top
U$71  [SCL0]  189.23,38.61 0 bottom
U$72  [SDA1]  189.1,36.07 0 bottom
U$73  [GND4]  189.23,30.99 0 bottom
U$74  [3V33]  189.1,33.53 0 bottom
U$75  [#INT0]  189.36,20.83 0 bottom
U$76  [#INT0]  185.17,20.83 0 top
U$77  [I2C]  135.38,37.97 0 bottom
U$78  [PWR0]  133.98,33.53 0 top
U$79  [#INT#0]  188.98,15.75 0 bottom
U$80  [#PWR#0]  145.54,32.26 0 bottom
U$81  [20]  149.48,21.34 0 top
U$82  [30]  144.4,21.34 0 top
U$83  [10]  167.39,21.34 0 top
U$84  [00]  172.34,21.34 0 top
U$85  [#INT0]  179.58,19.18 90 top
U$86  [3V30]  141.22,22.23 90 top
U$87  [3V30]  179.32,25.15 90 top
U$88  [40]  148.21,30.48 180 top
U$89  [50]  153.16,30.48 180 top
U$90  [60]  170.94,30.48 180 top
U$91  [70]  176.15,30.48 180 top
U$92  [#GND#0]  160.27,9.4 90 top
U$93  [#GND#0]  160.27,34.8 90 top
U$94  [#ADR0#0]  175.51,23.37 0 bottom
U$95  [#ADR1#0]  175.26,25.91 0 bottom
U$96  [#ADR2#0]  175.51,28.45 0 bottom
U$97  [3V33]  61.47,72.14 0 top
U$98  [GND4]  61.47,69.6 0 top
U$99  [QWIIC_GPIO7]  45.59,65.79 0 bottom
U$100  [SCL6]  61.72,77.22 0 top
U$101  [SDA5]  61.47,74.68 0 top
U$102  [QWIIC_6MM]  11.3,59.69 0 top
U$103  [SCL0]  66.29,77.22 0 bottom
U$104  [SDA1]  66.17,74.68 0 bottom
U$105  [GND4]  66.29,69.6 0 bottom
U$106  [3V33]  66.17,72.14 0 bottom
U$107  [#INT0]  66.42,59.44 0 bottom
U$108  [#INT0]  62.23,59.44 0 top
U$109  [I2C]  12.45,76.58 0 bottom
U$110  [PWR0]  11.05,72.14 0 top
U$111  [#INT#0]  66.04,54.36 0 bottom
U$112  [#PWR#0]  22.61,70.87 0 bottom
U$113  [20]  26.54,59.94 0 top
U$114  [30]  21.46,59.94 0 top
U$115  [10]  44.45,59.94 0 top
U$116  [00]  49.4,59.94 0 top
U$117  [#INT0]  56.64,57.78 90 top
U$118  [3V30]  18.29,60.83 90 top
U$119  [3V30]  56.39,63.75 90 top
U$120  [40]  25.27,69.09 180 top
U$121  [50]  30.23,69.09 180 top
U$122  [60]  48.01,69.09 180 top
U$123  [70]  53.21,69.09 180 top
U$124  [#GND#0]  37.34,48.01 90 top
U$125  [#GND#0]  37.34,73.41 90 top
U$126  [#ADR0#0]  52.58,61.98 0 bottom
U$127  [#ADR1#0]  52.32,64.52 0 bottom
U$128  [#ADR2#0]  52.58,67.06 0 bottom
U$129  [3V33]  122.94,72.14 0 top
U$130  [GND4]  122.94,69.6 0 top
U$131  [QWIIC_GPIO7]  107.06,65.79 0 bottom
U$132  [SCL6]  123.19,77.22 0 top
U$133  [SDA5]  122.94,74.68 0 top
U$134  [QWIIC_6MM]  72.77,59.69 0 top
U$135  [SCL0]  127.76,77.22 0 bottom
U$136  [SDA1]  127.64,74.68 0 bottom
U$137  [GND4]  127.76,69.6 0 bottom
U$138  [3V33]  127.64,72.14 0 bottom
U$139  [#INT0]  127.89,59.44 0 bottom
U$140  [#INT0]  123.7,59.44 0 top
U$141  [I2C]  73.91,76.58 0 bottom
U$142  [PWR0]  72.52,72.14 0 top
U$143  [#INT#0]  127.51,54.36 0 bottom
U$144  [#PWR#0]  84.07,70.87 0 bottom
U$145  [20]  88.01,59.94 0 top
U$146  [30]  82.93,59.94 0 top
U$147  [10]  105.92,59.94 0 top
U$148  [00]  110.87,59.94 0 top
U$149  [#INT0]  118.11,57.78 90 top
U$150  [3V30]  79.76,60.83 90 top
U$151  [3V30]  117.86,63.75 90 top
U$152  [40]  86.74,69.09 180 top
U$153  [50]  91.69,69.09 180 top
U$154  [60]  109.47,69.09 180 top
U$155  [70]  114.68,69.09 180 top
U$156  [#GND#0]  98.81,48.01 90 top
U$157  [#GND#0]  98.81,73.41 90 top
U$158  [#ADR0#0]  114.05,61.98 0 bottom
U$159  [#ADR1#0]  113.79,64.52 0 bottom
U$160  [#ADR2#0]  114.05,67.06 0 bottom
U$161  [3V33]  184.4,72.14 0 top
U$162  [GND4]  184.4,69.6 0 top
U$163  [QWIIC_GPIO7]  168.53,65.79 0 bottom
U$164  [SCL6]  184.66,77.22 0 top
U$165  [SDA5]  184.4,74.68 0 top
U$166  [QWIIC_6MM]  134.24,59.69 0 top
U$167  [SCL0]  189.23,77.22 0 bottom
U$168  [SDA1]  189.1,74.68 0 bottom
U$169  [GND4]  189.23,69.6 0 bottom
U$170  [3V33]  189.1,72.14 0 bottom
U$171  [#INT0]  189.36,59.44 0 bottom
U$172  [#INT0]  185.17,59.44 0 top
U$173  [I2C]  135.38,76.58 0 bottom
U$174  [PWR0]  133.98,72.14 0 top
U$175  [#INT#0]  188.98,54.36 0 bottom
U$176  [#PWR#0]  145.54,70.87 0 bottom
U$177  [20]  149.48,59.94 0 top
U$178  [30]  144.4,59.94 0 top
U$179  [10]  167.39,59.94 0 top
U$180  [00]  172.34,59.94 0 top
U$181  [#INT0]  179.58,57.78 90 top
U$182  [3V30]  141.22,60.83 90 top
U$183  [3V30]  179.32,63.75 90 top
U$184  [40]  148.21,69.09 180 top
U$185  [50]  153.16,69.09 180 top
U$186  [60]  170.94,69.09 180 top
U$187  [70]  176.15,69.09 180 top
U$188  [#GND#0]  160.27,48.01 90 top
U$189  [#GND#0]  160.27,73.41 90 top
U$190  [#ADR0#0]  175.51,61.98 0 bottom
U$191  [#ADR1#0]  175.26,64.52 0 bottom
U$192  [#ADR2#0]  175.51,67.06 0 bottom
U$193  [3V33]  61.47,110.74 0 top
U$194  [GND4]  61.47,108.2 0 top
U$195  [QWIIC_GPIO7]  45.59,104.39 0 bottom
U$196  [SCL6]  61.72,115.82 0 top
U$197  [SDA5]  61.47,113.28 0 top
U$198  [QWIIC_6MM]  11.3,98.3 0 top
U$199  [SCL0]  66.29,115.82 0 bottom
U$200  [SDA1]  66.17,113.28 0 bottom
U$201  [GND4]  66.29,108.2 0 bottom
U$202  [3V33]  66.17,110.74 0 bottom
U$203  [#INT0]  66.42,98.04 0 bottom
U$204  [#INT0]  62.23,98.04 0 top
U$205  [I2C]  12.45,115.19 0 bottom
U$206  [PWR0]  11.05,110.74 0 top
U$207  [#INT#0]  66.04,92.96 0 bottom
U$208  [#PWR#0]  22.61,109.47 0 bottom
U$209  [20]  26.54,98.55 0 top
U$210  [30]  21.46,98.55 0 top
U$211  [10]  44.45,98.55 0 top
U$212  [00]  49.4,98.55 0 top
U$213  [#INT0]  56.64,96.39 90 top
U$214  [3V30]  18.29,99.44 90 top
U$215  [3V30]  56.39,102.36 90 top
U$216  [40]  25.27,107.7 180 top
U$217  [50]  30.23,107.7 180 top
U$218  [60]  48.01,107.7 180 top
U$219  [70]  53.21,107.7 180 top
U$220  [#GND#0]  37.34,86.61 90 top
U$221  [#GND#0]  37.34,112.01 90 top
U$222  [#ADR0#0]  52.58,100.58 0 bottom
U$223  [#ADR1#0]  52.32,103.12 0 bottom
U$224  [#ADR2#0]  52.58,105.66 0 bottom
U$225  [3V33]  122.94,110.74 0 top
U$226  [GND4]  122.94,108.2 0 top
U$227  [QWIIC_GPIO7]  107.06,104.39 0 bottom
U$228  [SCL6]  123.19,115.82 0 top
U$229  [SDA5]  122.94,113.28 0 top
U$230  [QWIIC_6MM]  72.77,98.3 0 top
U$231  [SCL0]  127.76,115.82 0 bottom
U$232  [SDA1]  127.64,113.28 0 bottom
U$233  [GND4]  127.76,108.2 0 bottom
U$234  [3V33]  127.64,110.74 0 bottom
U$235  [#INT0]  127.89,98.04 0 bottom
U$236  [#INT0]  123.7,98.04 0 top
U$237  [I2C]  73.91,115.19 0 bottom
U$238  [PWR0]  72.52,110.74 0 top
U$239  [#INT#0]  127.51,92.96 0 bottom
U$240  [#PWR#0]  84.07,109.47 0 bottom
U$241  [20]  88.01,98.55 0 top
U$242  [30]  82.93,98.55 0 top
U$243  [10]  105.92,98.55 0 top
U$244  [00]  110.87,98.55 0 top
U$245  [#INT0]  118.11,96.39 90 top
U$246  [3V30]  79.76,99.44 90 top
U$247  [3V30]  117.86,102.36 90 top
U$248  [40]  86.74,107.7 180 top
U$249  [50]  91.69,107.7 180 top
U$250  [60]  109.47,107.7 180 top
U$251  [70]  114.68,107.7 180 top
U$252  [#GND#0]  98.81,86.61 90 top
U$253  [#GND#0]  98.81,112.01 90 top
U$254  [#ADR0#0]  114.05,100.58 0 bottom
U$255  [#ADR1#0]  113.79,103.12 0 bottom
U$256  [#ADR2#0]  114.05,105.66 0 bottom
U$257  [3V33]  184.4,110.74 0 top
U$258  [GND4]  184.4,108.2 0 top
U$259  [QWIIC_GPIO7]  168.53,104.39 0 bottom
U$260  [SCL6]  184.66,115.82 0 top
U$261  [SDA5]  184.4,113.28 0 top
U$262  [QWIIC_6MM]  134.24,98.3 0 top
U$263  [SCL0]  189.23,115.82 0 bottom
U$264  [SDA1]  189.1,113.28 0 bottom
U$265  [GND4]  189.23,108.2 0 bottom
U$266  [3V33]  189.1,110.74 0 bottom
U$267  [#INT0]  189.36,98.04 0 bottom
U$268  [#INT0]  185.17,98.04 0 top
U$269  [I2C]  135.38,115.19 0 bottom
U$270  [PWR0]  133.98,110.74 0 top
U$271  [#INT#0]  188.98,92.96 0 bottom
U$272  [#PWR#0]  145.54,109.47 0 bottom
U$273  [20]  149.48,98.55 0 top
U$274  [30]  144.4,98.55 0 top
U$275  [10]  167.39,98.55 0 top
U$276  [00]  172.34,98.55 0 top
U$277  [#INT0]  179.58,96.39 90 top
U$278  [3V30]  141.22,99.44 90 top
U$279  [3V30]  179.32,102.36 90 top
U$280  [40]  148.21,107.7 180 top
U$281  [50]  153.16,107.7 180 top
U$282  [60]  170.94,107.7 180 top
U$283  [70]  176.15,107.7 180 top
U$284  [#GND#0]  160.27,86.61 90 top
U$285  [#GND#0]  160.27,112.01 90 top
U$286  [#ADR0#0]  175.51,100.58 0 bottom
U$287  [#ADR1#0]  175.26,103.12 0 bottom
U$288  [#ADR2#0]  175.51,105.66 0 bottom

## Library data of the parts
ADR0 ADR1-ADR26 I2C I2C1-I2C8 INT INT1-INT8 PWR PWR1-PWR8 = SparkFun-Jumpers
C1-C9 = SparkFun-Capacitors; PROD_ID: CAP-00810
D1-D9 = SparkFun-LED; PROD_ID: DIO-00819
E$1-E$4 FD1-FD18 FRAME1-FRAME9 LOGO1-LOGO36 U$21 U$27 U$70 U$102 U$134 U$166 U$198 U$230 U$262 = SparkFun-Aesthetics
E$5 = SparkFun-Retired
H1-H18 = SparkFun-Hardware
J1 J5 J6 J8 J11-J14 J19-J22 J27-J30 J35-J38 J43-J46 J51-J54 J59-J62 J67-J70 = SparkFun-Connectors; PROD_ID: CON-14722; STOREFRONT_SKU: PRT-15900
J2-J4 J10 J17 J18 J25 J26 J33 J34 J41 J42 J49 J50 J57 J58 J65 J66 = SparkFun-Connectors; PROD_ID: CONN-13694; VALUE: QWIIC_RIGHT_ANGLE
J7 J15 J23 J31 J39 J47 J55 J63 J71 = SparkFun-Connectors
J9 J16 J24 J32 J40 J48 J56 J64 J72 = SparkFun-Connectors; PROD_ID: CONN-09696
JP1-JP36 = SparkFun
R1-R5 R8-R12 R15-R19 R22-R26 R29-R33 R36-R40 R43-R47 R50-R54 R57-R61 = SparkFun-Resistors; PROD_ID: RES-08272
R6 R13 R20 R27 R34 R41 R48 R55 R62 = SparkFun-Resistors; PROD_ID: RES-00824
R7 R14 R21 R28 R35 R42 R49 R56 R63 = SparkFun-Resistors; PROD_ID: RES-07856
U1-U9 = SparkFun-IC-Conversion; PROD_ID: IC-14889
U$1 U$45 U$77 U$109 U$141 U$173 U$205 U$237 U$269 = SparkFun-Buzzard
U$2 U$4-U$6 U$11 U$12 U$14 U$15 U$29-U$35 U$37-U$40 U$46-U$64 U$78-U$96 U$110-U$128 U$142-U$160 U$174-U$192 U$206-U$224 U$238-U$256 U$270-U$288 = output
U$3 U$7-U$10 U$16-U$20 U$25 U$26 U$41 U$42 U$65-U$69 U$73 U$74 U$97-U$101 U$105 U$106 U$129-U$133 U$137 U$138 U$161-U$165 U$169 U$170 U$193-U$197 U$201 U$202 U$225-U$229 U$233 U$234 U$257-U$261 U$265 U$266 = buzzard_labels (44)
U$13 U$43 U$75 U$107 U$139 U$171 U$203 U$235 U$267 = buzzard_labels (52)
U$22 U$44 U$76 U$108 U$140 U$172 U$204 U$236 U$268 = buzzard_labels (54)
U$23 U$24 U$28 U$36 U$71 U$72 U$103 U$104 U$135 U$136 U$167 U$168 U$199 U$200 U$231 U$232 U$263 U$264 = buzzard_labels (51)

## Nets
3.3V: ADR0.2 ADR1.2 ADR2.2 C4.1 I2C.2 INT.2 J1.1 J2.2 J4.2 J6.4 J8.4 J9.2 PWR.2 U3.16
3.3V1: ADR3.2 ADR4.2 ADR5.2 C1.1 I2C1.2 INT1.2 J3.2 J10.2 J12.4 J13.1 J14.4 J16.2 PWR1.2 U1.16
3.3V2: ADR6.2 ADR7.2 ADR8.2 C2.1 I2C2.2 INT2.2 J17.2 J18.2 J20.4 J21.1 J22.4 J24.2 PWR2.2 U2.16
3.3V3: ADR9.2 ADR10.2 ADR11.2 C3.1 I2C3.2 INT3.2 J25.2 J26.2 J28.4 J29.1 J30.4 J32.2 PWR3.2 U4.16
3.3V4: ADR12.2 ADR13.2 ADR14.2 C5.1 I2C4.2 INT4.2 J33.2 J34.2 J36.4 J37.1 J38.4 J40.2 PWR4.2 U5.16
3.3V5: ADR15.2 ADR16.2 ADR17.2 C6.1 I2C5.2 INT5.2 J41.2 J42.2 J44.4 J45.1 J46.4 J48.2 PWR5.2 U6.16
3.3V6: ADR18.2 ADR19.2 ADR20.2 C7.1 I2C6.2 INT6.2 J49.2 J50.2 J52.4 J53.1 J54.4 J56.2 PWR6.2 U7.16
3.3V7: ADR21.2 ADR22.2 ADR23.2 C8.1 I2C7.2 INT7.2 J57.2 J58.2 J60.4 J61.1 J62.4 J64.2 PWR7.2 U8.16
3.3V8: ADR24.2 ADR25.2 ADR26.2 C9.1 I2C8.2 INT8.2 J65.2 J66.2 J68.4 J69.1 J70.4 J72.2 PWR8.2 U9.16
!INT: J5.1 J7.1 R6.1 U3.13
!INT1: J11.1 J15.1 R13.1 U1.13
!INT2: J19.1 J23.1 R20.1 U2.13
!INT3: J27.1 J31.1 R27.1 U4.13
!INT4: J35.1 J39.1 R34.1 U5.13
!INT5: J43.1 J47.1 R41.1 U6.13
!INT6: J51.1 J55.1 R48.1 U7.13
!INT7: J59.1 J63.1 R55.1 U8.13
!INT8: J67.1 J71.1 R62.1 U9.13
ADR0: ADR0.1 R5.2 U3.1
ADR1: ADR1.1 R3.2 U3.2
ADR2: ADR2.1 R1.2 U3.3
ADR3: ADR3.1 R12.2 U1.1
ADR4: ADR4.1 R11.2 U1.2
ADR5: ADR5.1 R10.2 U1.3
ADR6: ADR6.1 R19.2 U2.1
ADR7: ADR7.1 R18.2 U2.2
ADR8: ADR8.1 R17.2 U2.3
ADR9: ADR9.1 R26.2 U4.1
ADR10: ADR10.1 R25.2 U4.2
ADR11: ADR11.1 R24.2 U4.3
ADR12: ADR12.1 R33.2 U5.1
ADR13: ADR13.1 R32.2 U5.2
ADR14: ADR14.1 R31.2 U5.3
ADR15: ADR15.1 R40.2 U6.1
ADR16: ADR16.1 R39.2 U6.2
ADR17: ADR17.1 R38.2 U6.3
ADR18: ADR18.1 R47.2 U7.1
ADR19: ADR19.1 R46.2 U7.2
ADR20: ADR20.1 R45.2 U7.3
ADR21: ADR21.1 R54.2 U8.1
ADR22: ADR22.1 R53.2 U8.2
ADR23: ADR23.1 R52.2 U8.3
ADR24: ADR24.1 R61.2 U9.1
ADR25: ADR25.1 R60.2 U9.2
ADR26: ADR26.1 R59.2 U9.3
GND: C4.2 D1.C J1.4 J2.1 J4.1 J5.4 J6.1 J8.1 J9.1 R1.1 R3.1 R5.1 U3.8
GND1: C1.2 D2.C J3.1 J10.1 J11.4 J12.1 J13.4 J14.1 J16.1 R10.1 R11.1 R12.1 U1.8
GND2: C2.2 D3.C J17.1 J18.1 J19.4 J20.1 J21.4 J22.1 J24.1 R17.1 R18.1 R19.1 U2.8
GND3: C3.2 D4.C J25.1 J26.1 J27.4 J28.1 J29.4 J30.1 J32.1 R24.1 R25.1 R26.1 U4.8
GND4: C5.2 D5.C J33.1 J34.1 J35.4 J36.1 J37.4 J38.1 J40.1 R31.1 R32.1 R33.1 U5.8
GND5: C6.2 D6.C J41.1 J42.1 J43.4 J44.1 J45.4 J46.1 J48.1 R38.1 R39.1 R40.1 U6.8
GND6: C7.2 D7.C J49.1 J50.1 J51.4 J52.1 J53.4 J54.1 J56.1 R45.1 R46.1 R47.1 U7.8
GND7: C8.2 D8.C J57.1 J58.1 J59.4 J60.1 J61.4 J62.1 J64.1 R52.1 R53.1 R54.1 U8.8
GND8: C9.2 D9.C J65.1 J66.1 J67.4 J68.1 J69.4 J70.1 J72.1 R59.1 R60.1 R61.1 U9.8
N$1: INT.1 R6.2
N$2: D1.A R7.1
N$3: PWR.1 R7.2
N$4: INT1.1 R13.2
N$5: D2.A R14.1
N$6: PWR1.1 R14.2
N$7: INT2.1 R20.2
N$8: D3.A R21.1
N$9: PWR2.1 R21.2
N$10: INT3.1 R27.2
N$11: D4.A R28.1
N$12: PWR3.1 R28.2
N$13: INT4.1 R34.2
N$14: D5.A R35.1
N$15: PWR4.1 R35.2
N$16: INT5.1 R41.2
N$17: D6.A R42.1
N$18: PWR5.1 R42.2
N$19: INT6.1 R48.2
N$20: D7.A R49.1
N$21: PWR6.1 R49.2
N$22: INT7.1 R55.2
N$23: D8.A R56.1
N$24: PWR7.1 R56.2
N$25: INT8.1 R62.2
N$26: D9.A R63.1
N$27: PWR8.1 R63.2
P0: J5.2 U3.4
P1: J5.3 U3.5
P2: J8.2 U3.6
P3: J8.3 U3.7
P4: J1.2 U3.9
P5: J1.3 U3.10
P6: J6.2 U3.11
P7: J6.3 U3.12
P8: J11.2 U1.4
P9: J14.2 U1.6
P10: J14.3 U1.7
P11: J11.3 U1.5
P12: J13.2 U1.9
P13: J13.3 U1.10
P14: J12.2 U1.11
P15: J12.3 U1.12
P16: J19.2 U2.4
P17: J22.2 U2.6
P18: J22.3 U2.7
P19: J19.3 U2.5
P20: J21.2 U2.9
P21: J21.3 U2.10
P22: J20.2 U2.11
P23: J20.3 U2.12
P24: J27.2 U4.4
P25: J30.2 U4.6
P26: J30.3 U4.7
P27: J27.3 U4.5
P28: J29.2 U4.9
P29: J29.3 U4.10
P30: J28.2 U4.11
P31: J28.3 U4.12
P32: J35.2 U5.4
P33: J38.2 U5.6
P34: J38.3 U5.7
P35: J35.3 U5.5
P36: J37.2 U5.9
P37: J37.3 U5.10
P38: J36.2 U5.11
P39: J36.3 U5.12
P40: J43.2 U6.4
P41: J46.2 U6.6
P42: J46.3 U6.7
P43: J43.3 U6.5
P44: J45.2 U6.9
P45: J45.3 U6.10
P46: J44.2 U6.11
P47: J44.3 U6.12
P48: J51.2 U7.4
P49: J54.2 U7.6
P50: J54.3 U7.7
P51: J51.3 U7.5
P52: J53.2 U7.9
P53: J53.3 U7.10
P54: J52.2 U7.11
P55: J52.3 U7.12
P56: J59.2 U8.4
P57: J62.2 U8.6
P58: J62.3 U8.7
P59: J59.3 U8.5
P60: J61.2 U8.9
P61: J61.3 U8.10
P62: J60.2 U8.11
P63: J60.3 U8.12
P64: J67.2 U9.4
P65: J70.2 U9.6
P66: J70.3 U9.7
P67: J67.3 U9.5
P68: J69.2 U9.9
P69: J69.3 U9.10
P70: J68.2 U9.11
P71: J68.3 U9.12
SCL: J2.4 J4.4 J9.4 R4.1 U3.14
SCL1: J3.4 J10.4 J16.4 R9.1 U1.14
SCL2: J17.4 J18.4 J24.4 R16.1 U2.14
SCL3: J25.4 J26.4 J32.4 R23.1 U4.14
SCL4: J33.4 J34.4 J40.4 R30.1 U5.14
SCL5: J41.4 J42.4 J48.4 R37.1 U6.14
SCL6: J49.4 J50.4 J56.4 R44.1 U7.14
SCL7: J57.4 J58.4 J64.4 R51.1 U8.14
SCL8: J65.4 J66.4 J72.4 R58.1 U9.14
SCL_PU1: I2C.1 R2.2
SCL_PU2: I2C1.1 R8.2
SCL_PU3: I2C2.1 R15.2
SCL_PU4: I2C3.1 R22.2
SCL_PU5: I2C4.1 R29.2
SCL_PU6: I2C5.1 R36.2
SCL_PU7: I2C6.1 R43.2
SCL_PU8: I2C7.1 R50.2
SCL_PU9: I2C8.1 R57.2
SDA: J2.3 J4.3 J9.3 R2.1 U3.15
SDA1: J3.3 J10.3 J16.3 R8.1 U1.15
SDA2: J17.3 J18.3 J24.3 R15.1 U2.15
SDA3: J25.3 J26.3 J32.3 R22.1 U4.15
SDA4: J33.3 J34.3 J40.3 R29.1 U5.15
SDA5: J41.3 J42.3 J48.3 R36.1 U6.15
SDA6: J49.3 J50.3 J56.3 R43.1 U7.15
SDA7: J57.3 J58.3 J64.3 R50.1 U8.15
SDA8: J65.3 J66.3 J72.3 R57.1 U9.15
SDA_PU1: I2C.3 R4.2
SDA_PU2: I2C1.3 R9.2
SDA_PU3: I2C2.3 R16.2
SDA_PU4: I2C3.3 R23.2
SDA_PU5: I2C4.3 R30.2
SDA_PU6: I2C5.3 R37.2
SDA_PU7: I2C6.3 R44.2
SDA_PU8: I2C7.3 R51.2
SDA_PU9: I2C8.3 R58.2